# Altium PCB airDrums3.PcbDoc
Units mm, origin at the board's own origin, x right, y up, seen from the top; angles counter-clockwise.
Board outline 120 x 14 mm, 2 copper layers (Top Layer, Bottom Layer); 11 components, 13 nets, 59 pads, 2 vias.
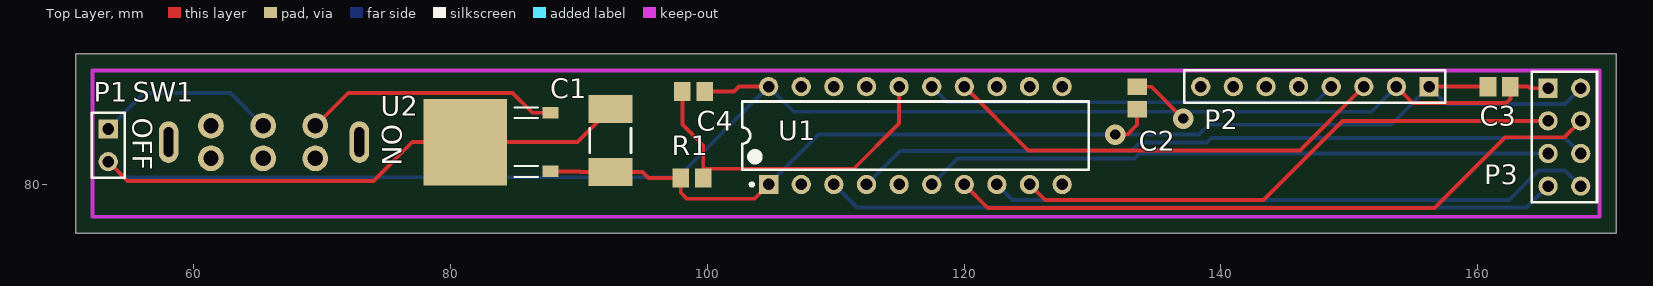
[diagram p0: Top Layer view]
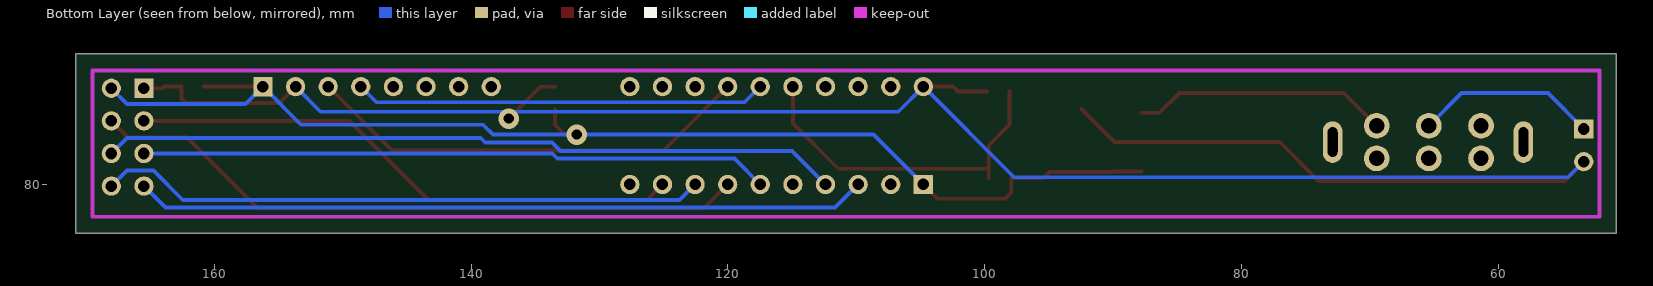
[diagram p1: Bottom Layer view, seen from below]

## Layer stack, top to bottom
Top Layer: signal copper 0.0356
Dielectric: dielectric 0.32, FR-4, Dk 4.8
Bottom Layer: signal copper 0.0356

## Board outline
50.8,76.2 170.8,76.2 170.8,90.2 50.8,90.2

## Design rules (kind name [scope] priority, off if disabled: settings)
Clearance [All] p1: gap=0.3
HoleSize [All] p1: absolutevalues=TRUE maxlimit=2.54 minlimit=0.3 maxpercent=80.000 minpercent=20.000
HoleToHoleClearance [All] p1: gap=0.2 allowstackedmicrovias=TRUE
MinimumSolderMaskSliver [All] p1: minsoldermaskwidth=0.2
PolygonConnect [All] p1: connectstyle=Relief reliefconductorwidth=0.254 reliefentries=4 polygonreliefangle="90 Angle" airgapwidth=0.254
RoutingVias [All] p1: holewidth=0.8 width=1.6 viastyle="Through Hole" minholewidth=0.711 minwidth=1.27 maxholewidth=0.711 maxwidth=1.27
SilkToSilkClearance [All] p1: silktosilkclearance=0.2
SilkToSolderMaskClearance [IsPad] p1: minsilkscreentomaskgap=0.2 clearancetoexposedcopper=TRUE
SolderMaskExpansion [All] p1: expansion=0.102
Width [All] p1: maxlimit=0.3 minlimit=0.3 preferedwidth=0.3
23 further rules are at their usual default settings.

## Components (designator, comment, footprint, x,y, rotation, side; value= is the part's Value field where it differs from the comment)
C1 "100uF" CAPC6032X28N 92.456,83.439 r270 top
C2 "10nF" CAP0805 133.477,86.741 r270 top
C3 "10nF" CAP0805 161.671,87.63 r180 top
C4 "1nF" CAP0805 98.933,87.249 r180 top
P1 "Header 2" HDR1X2 53.34,84.328 r270 top
P2 "Header 8" HDR1X8 156.21,87.63 r180 top
P3 "Header 4X2" HDR2X4 165.481,87.503 r270 top
R1 "47k" CAP0805 98.806,80.518 r180 top
SW1 "switch" Switch 65.659,82.042 r270 top
U1 "MSP430G2553IN20" TI-N20 116.205,83.82 r90 top
U2 "LP38690_NDP_3" TD03B 81.28,83.312 r90 top

## Footprints (in the part's own frame and the unit in brackets; to place one, negate y for a bottom-side part, rotate by r counter-clockwise, add the part's x,y. Pads: shape width x height; smd on the part's side, far side on the other; paste and mask are expansions set on the pad)
CAP0805 [mm] "Chip Capacitor, 2-Leads, Body 2.01x1.25mm, IPC Medium Density"
  rect 1.3x1.5 smd: 1(-0.875,0) 2(0.875,0)
  body extent -1.1,-0.72 1.11,0.72, height 0.94
CAPC6032X28N [mm] "Chip Capacitor, 2-Leads, Body 6.00x3.25mm, IPC Medium Density"
  rect 2.2x3.4 smd: 1(-2.45,0) 2(2.45,0)
  silkscreen extent -0.95,-1.6 0.95,1.6, body extent -3.1,-1.7 3.1,1.7, height 2.8
HDR1X2 [mm] "Connector; Header; 2 Position"
  rect 1.5x1.5 hole 0.9: 1(0,0)
  round 1.5 hole 0.9: 2(2.54,0)
  silkscreen extent -1.27,-1.27 3.81,1.27
HDR1X8 [mm] "Connector; Header; 8 Position"
  rect 1.5x1.5 hole 0.9: 1(0,0)
  round 1.5 hole 0.9: 2(2.54,0) 3(5.08,0) 4(7.62,0) 5(10.16,0) 6(12.7,0) 7(15.24,0) 8(17.78,0)
  silkscreen extent -1.27,-1.27 19.05,1.27
HDR2X4 [mm] "Connector; Header; 4x2 Position"
  rect 1.5x1.5 hole 0.9: 1(0,0)
  round 1.5 hole 0.9: 2(0,2.54) 3(2.54,0) 4(2.54,2.54) 5(5.08,0) 6(5.08,2.54) 7(7.62,0) 8(7.62,2.54)
  silkscreen extent -1.27,-1.27 8.89,3.81
Switch [mm]
  round 2 hole 1.2: 1(-2.54,3.81) 2(-2.54,-0.254) 3(-2.54,-4.318) 4(0,-4.318) 5(0,-0.254) 6(0,3.81)
  oval 3.24x1.524 hole 0.762 slot 2.3 at 0 deg: 7(-1.27,7.239) 8(-1.27,-7.62)
TD03B [mil]
  rect 35x48 smd: 1(-89.96,-256) 3(89.96,-256)
  rect 265x256 smd: 2(0,6)
  silkscreen extent -106,-218 106,-146
TI-N20 [mm] "DIP, 20-Leads, Body 25.4x6.35 mm, Pitch 2.54 mm"
  rect 1.5x1.5 hole 0.9: 1(-3.81,11.43)
  round 1.5 hole 0.9: 2(-3.81,8.89) 3(-3.81,6.35) 4(-3.81,3.81) 5(-3.81,1.27) 6(-3.81,-1.27) 7(-3.81,-3.81) 8(-3.81,-6.35) 9(-3.81,-8.89) 10(-3.81,-11.43) 11(3.81,-11.43) 12(3.81,-8.89) 13(3.81,-6.35) 14(3.81,-3.81) 15(3.81,-1.27) 16(3.81,1.27) 17(3.81,3.81) 18(3.81,6.35) 19(3.81,8.89) 20(3.81,11.43)
  silkscreen extent -3.93,-13.5 2.65,13.5, body extent -3.95,-13.45 3.95,13.45, height 5.08

## Part data
C1 C2 C3 C4: library part "Cap Semi", "Capacitor (Semiconductor SIM Model)"
P1: "Header, 2-Pin"
P2: "Header, 8-Pin"
P3: "Header, 4-Pin, Dual row"
R1: library part "Res Semi", "Semiconductor Resistor"
U1: "16 MHz Mixed Signal Microcontroller with 16 KB Flash, 512 B SRAM and 24 GPIOs, -40 to 85 degC, 20-pin DIP (N), Pb-Free (RoHS)"
U2: "Imported"

## Via types
v1: diameter 1.6, hole 0.8, Top Layer to Bottom Layer, 2 vias

## Nets (pads, with @x,y where several pads share a name; then routed paths per layer and width w, separated by ;. In a path a pad name is that pad's centre, name@x,y a point inside that pad or via, vN(x,y) a via of type N, cw(c..) or ccw(c..) an arc to the next point about the centre after c; other vN are vias at no path point)
CE: P3.3 U1.9 | length 43.4
  Top Layer w0.3: U1.9 126.314,78.791 143.307,78.791 149.479,84.963 P3.3
CSN: P3.4 U1.7 | length 51.6
  Top Layer w0.3: U1.7 121.844,78.181 156.642,78.181 162.154,83.693 166.751,83.693 P3.4
GND: C1.1 C2.1 C3.1 C4.1 P1.2 P2.2 P3.1 U1.20 U2.2 | length 171.4
  Top Layer w0.3: P1.2 54.839,80.289 73.99,80.289 77.013,83.312 U2.2 89.879,83.312 C1.1 ; C4.1 102.083,87.249 102.464,87.63 U1.20 ; C2.1 134.583,87.616 v1(137.058,85.141) ; P2.2 154.94,86.36 162.228,86.36 162.546,86.677 C3.1 163.932,87.63 164.059,87.503 P3.1
  Bottom Layer w0.3: P1.2 54.559,80.569 97.714,80.569 U1.20 106.731,85.674 v1@136.525,85.674 ; v1(137.058,85.141) v1@136.525,85.674 ; P2.2 151.714,85.674 v1@136.525,85.674
IRQ: P3.8 U1.8 | length 47.4
  Bottom Layer w0.3: U1.8 123.755,78.81 162.452,78.81 164.744,81.102 166.802,81.102 P3.8
MISO: P3.7 U1.3 | length 57.1
  Bottom Layer w0.3: U1.3 111.655,78.21 163.808,78.21 P3.7
MOSI: P3.6 U1.4 | length 57.6
  Bottom Layer w0.3: U1.4 115.012,82.627 133.035,82.627 133.699,83.291 138.9,83.291 139.252,83.642 166.802,83.642 P3.6
NetC4_2: C4.2 R1.1 U1.16 | length 27
  Top Layer w0.3: C4.2 98.058,84.681 99.681,83.058 R1.1@99.681,81.229 ; R1.1 R1.1@99.681,81.229 ; U1.16 114.935,84.76 111.404,81.229 R1.1@99.681,81.229
NetP1_1: P1.1 SW1.2 | length 14.3
  Bottom Layer w0.3: P1.1 56.134,87.122 62.865,87.122 SW1.2
NetSW1_1: SW1.1 U2.3 | length 20
  Top Layer w0.3: SW1.1 72.034,87.147 84.836,87.147 86.386,85.597 U2.3
SCK: P3.5 U1.6 | length 49
  Bottom Layer w0.3: U1.6 119.492,82.027 133.284,82.027 133.68,82.423 P3.5
SCL: P2.3 U1.14 | length 35.2
  Top Layer w0.3: U1.14 124.999,82.646 146.146,82.646 P2.3
SDA: P2.4 U1.15 | length 32.1
  Bottom Layer w0.3: U1.15 118.694,86.411 147.371,86.411 P2.4
VCC: C1.2 C2.2 C3.2 P2.1 P3.2 R1.2 U1.1 U2.1 | length 117.4
  Top Layer w0.3: U2.1 90.094,81.027 90.132,80.989 C1.2 94.945,80.989 95.416,80.518 R1.2 97.931,79.375 98.414,78.892 103.657,78.892 U1.1 ; v1(131.775,83.896) 132.715,83.896 133.477,84.658 C2.2 ; P2.1 C3.2
  Bottom Layer w0.3: U1.1 108.656,83.891 ; v1(131.775,83.896) 108.661,83.896 108.656,83.891 ; P3.2 166.802,86.284 157.556,86.284 P2.1 153.238,84.658 139.065,84.658 138.298,83.891 108.656,83.891
pads on no net: P2.5 P2.6 P2.7 P2.8 SW1.3 SW1.4 SW1.5 SW1.6 SW1.7 SW1.8 U1.2 U1.5 U1.10 U1.11 U1.12 U1.13 U1.17 U1.18 U1.19

## Keep-outs
Keep-Out Layer:
  lines w0.3: 52.1,77.5 169.5,77.5 169.5,88.9 52.1,88.9 52.1,77.5

## Silkscreen, mask and mechanical layers (free items; w line width, h text height)
Drill Drawing:
  text ".LEGEND" at 175.88,81.28 h1.52
  text "Drill Drawing." at 175.88,78.74 h1.52

## Dimensions
52.1,77.5 to 169.5,77.5 on Mechanical 1
52.1,77.5 to 52.1,88.9 on Mechanical 1

## Text inside footprints (layer, text, board x,y; h text height)
SW1: Top Overlay "ON" at 74.676,84.709 h1.52 r270; Top Overlay "OFF" at 55.245,85.217 h1.52 r270